# Altium PCB PlatypusDAQ.PcbDoc (part 1 of 2)
Units mil, origin at the board's own origin, x right, y up, seen from the top; angles counter-clockwise.
Board outline 10000 x 4000 mil, 4 copper layers (Top Layer, POWER, GND, Bottom Layer); 258 components, 327 nets, 1659 pads, 184 vias.
Unrouted connection lines stored in the file: 960.
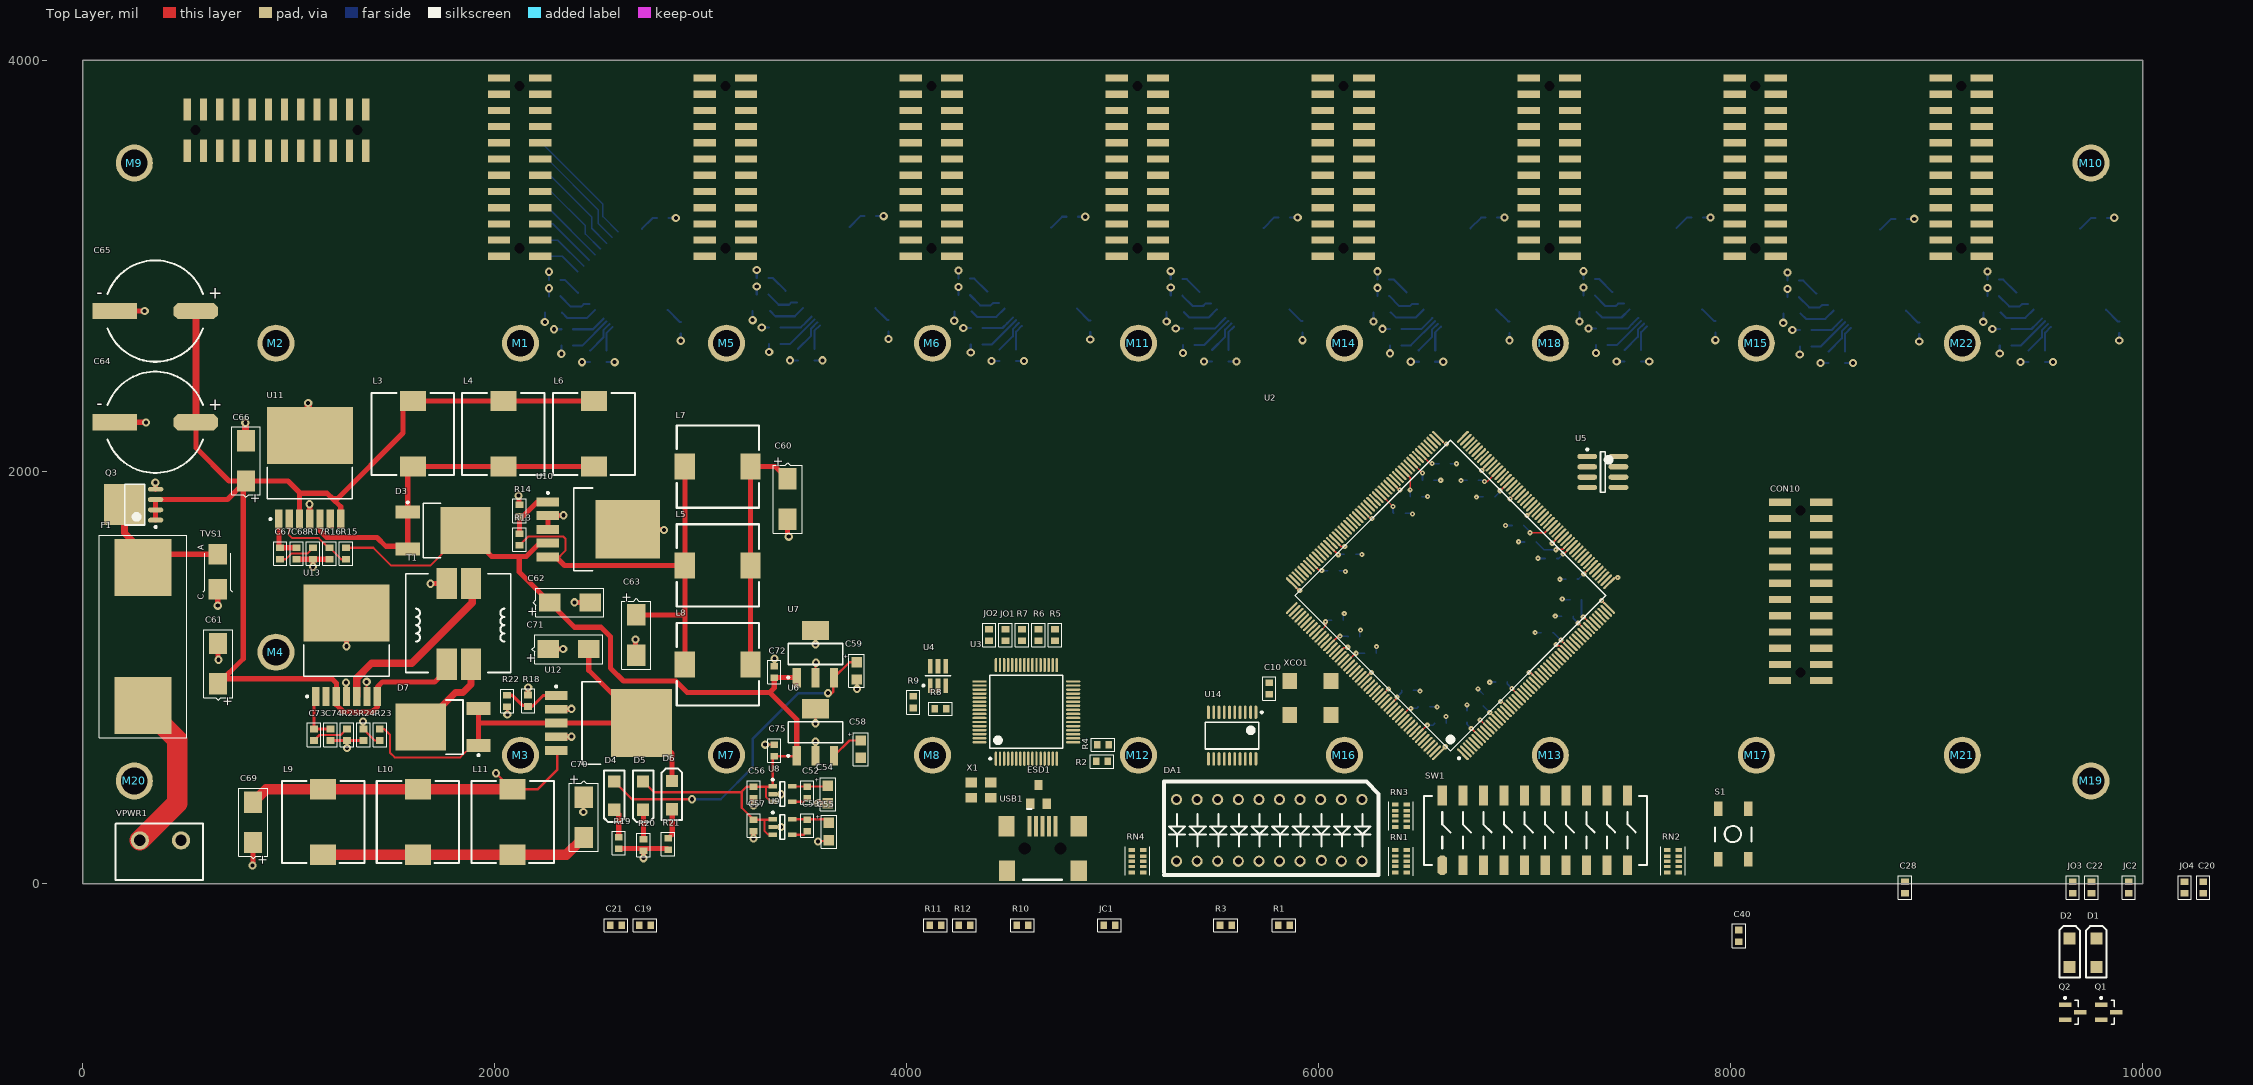
[diagram p0: Top Layer view]
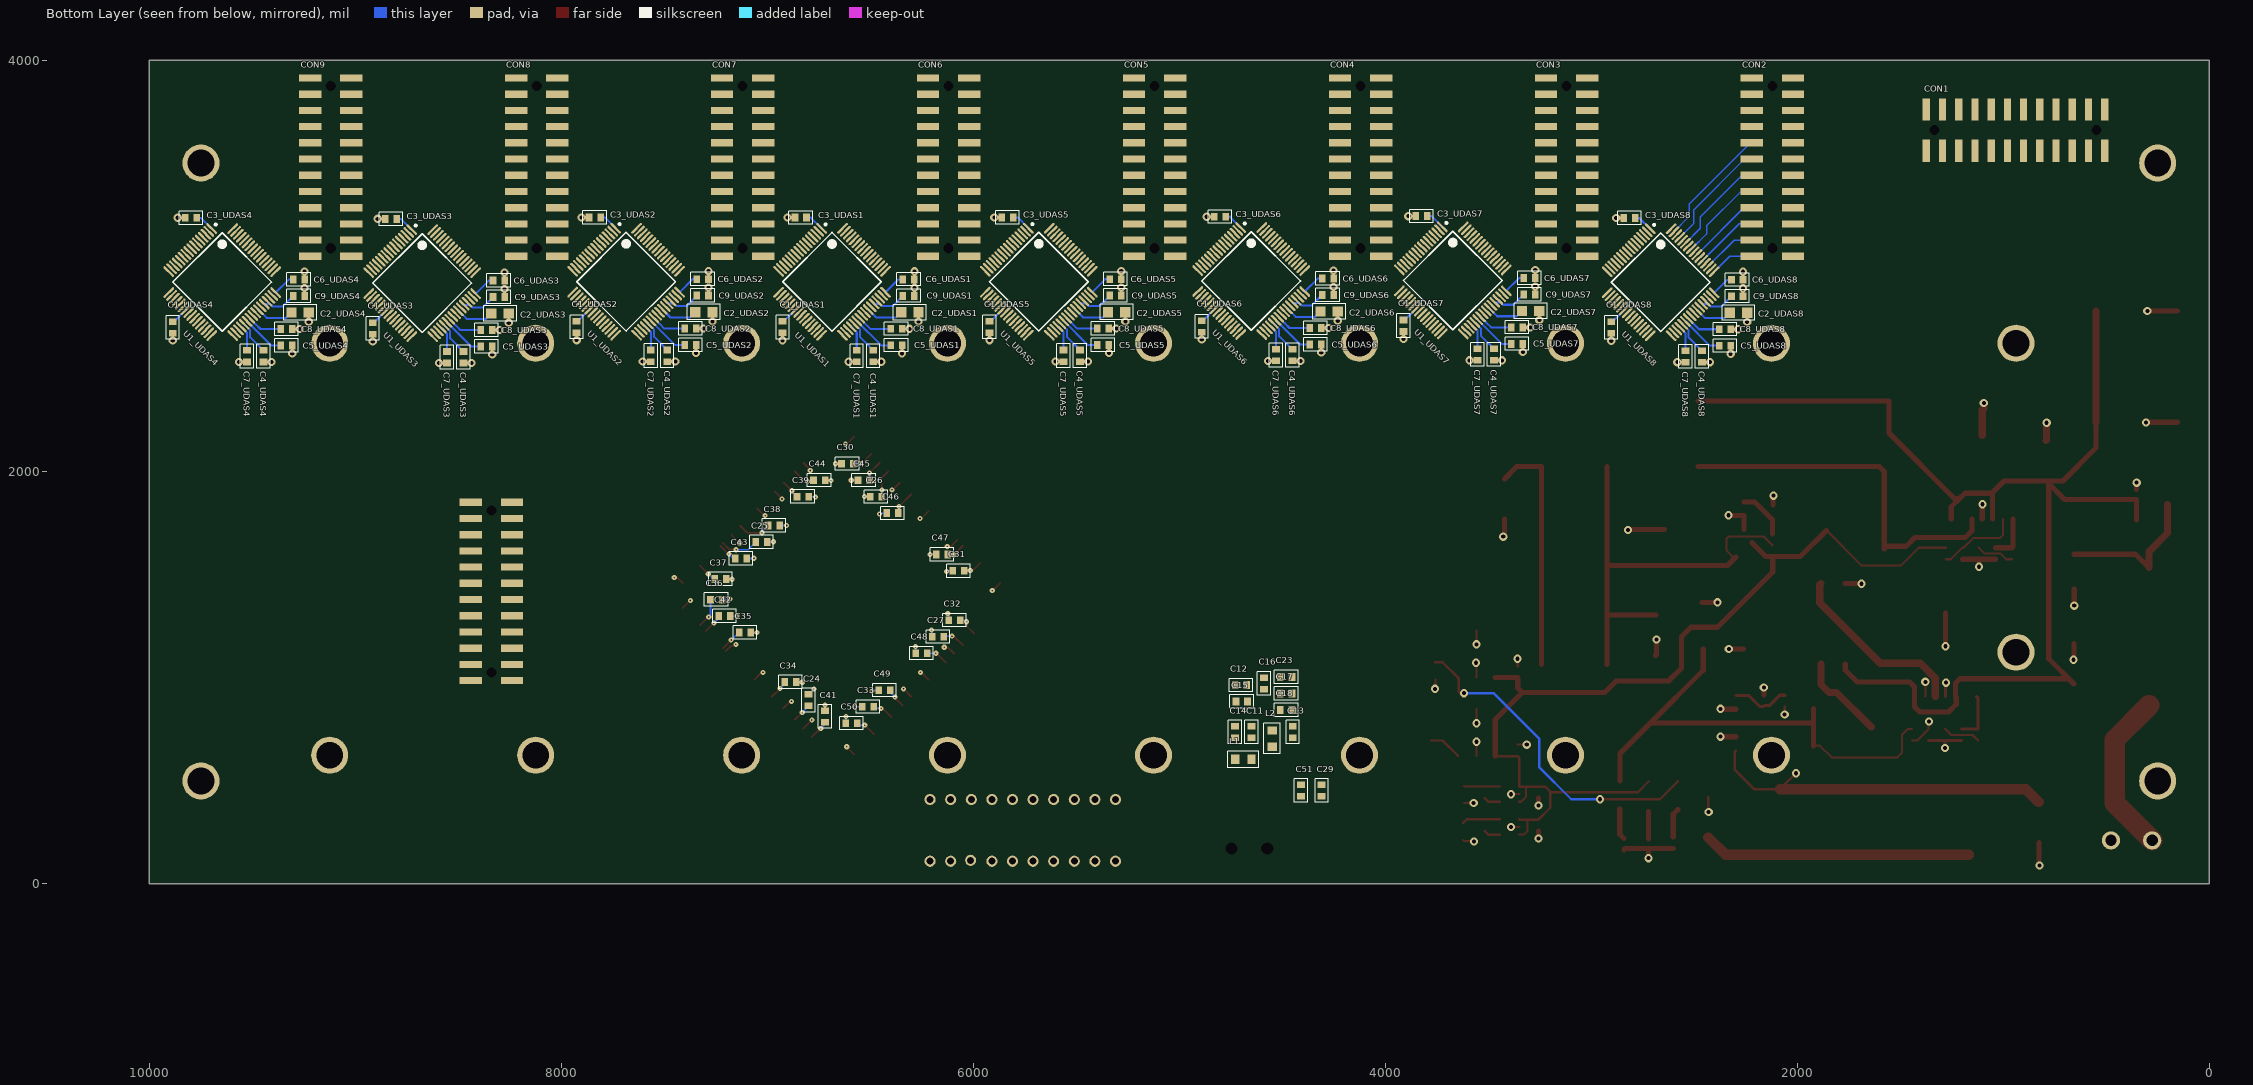
[diagram p1: Bottom Layer view, seen from below]
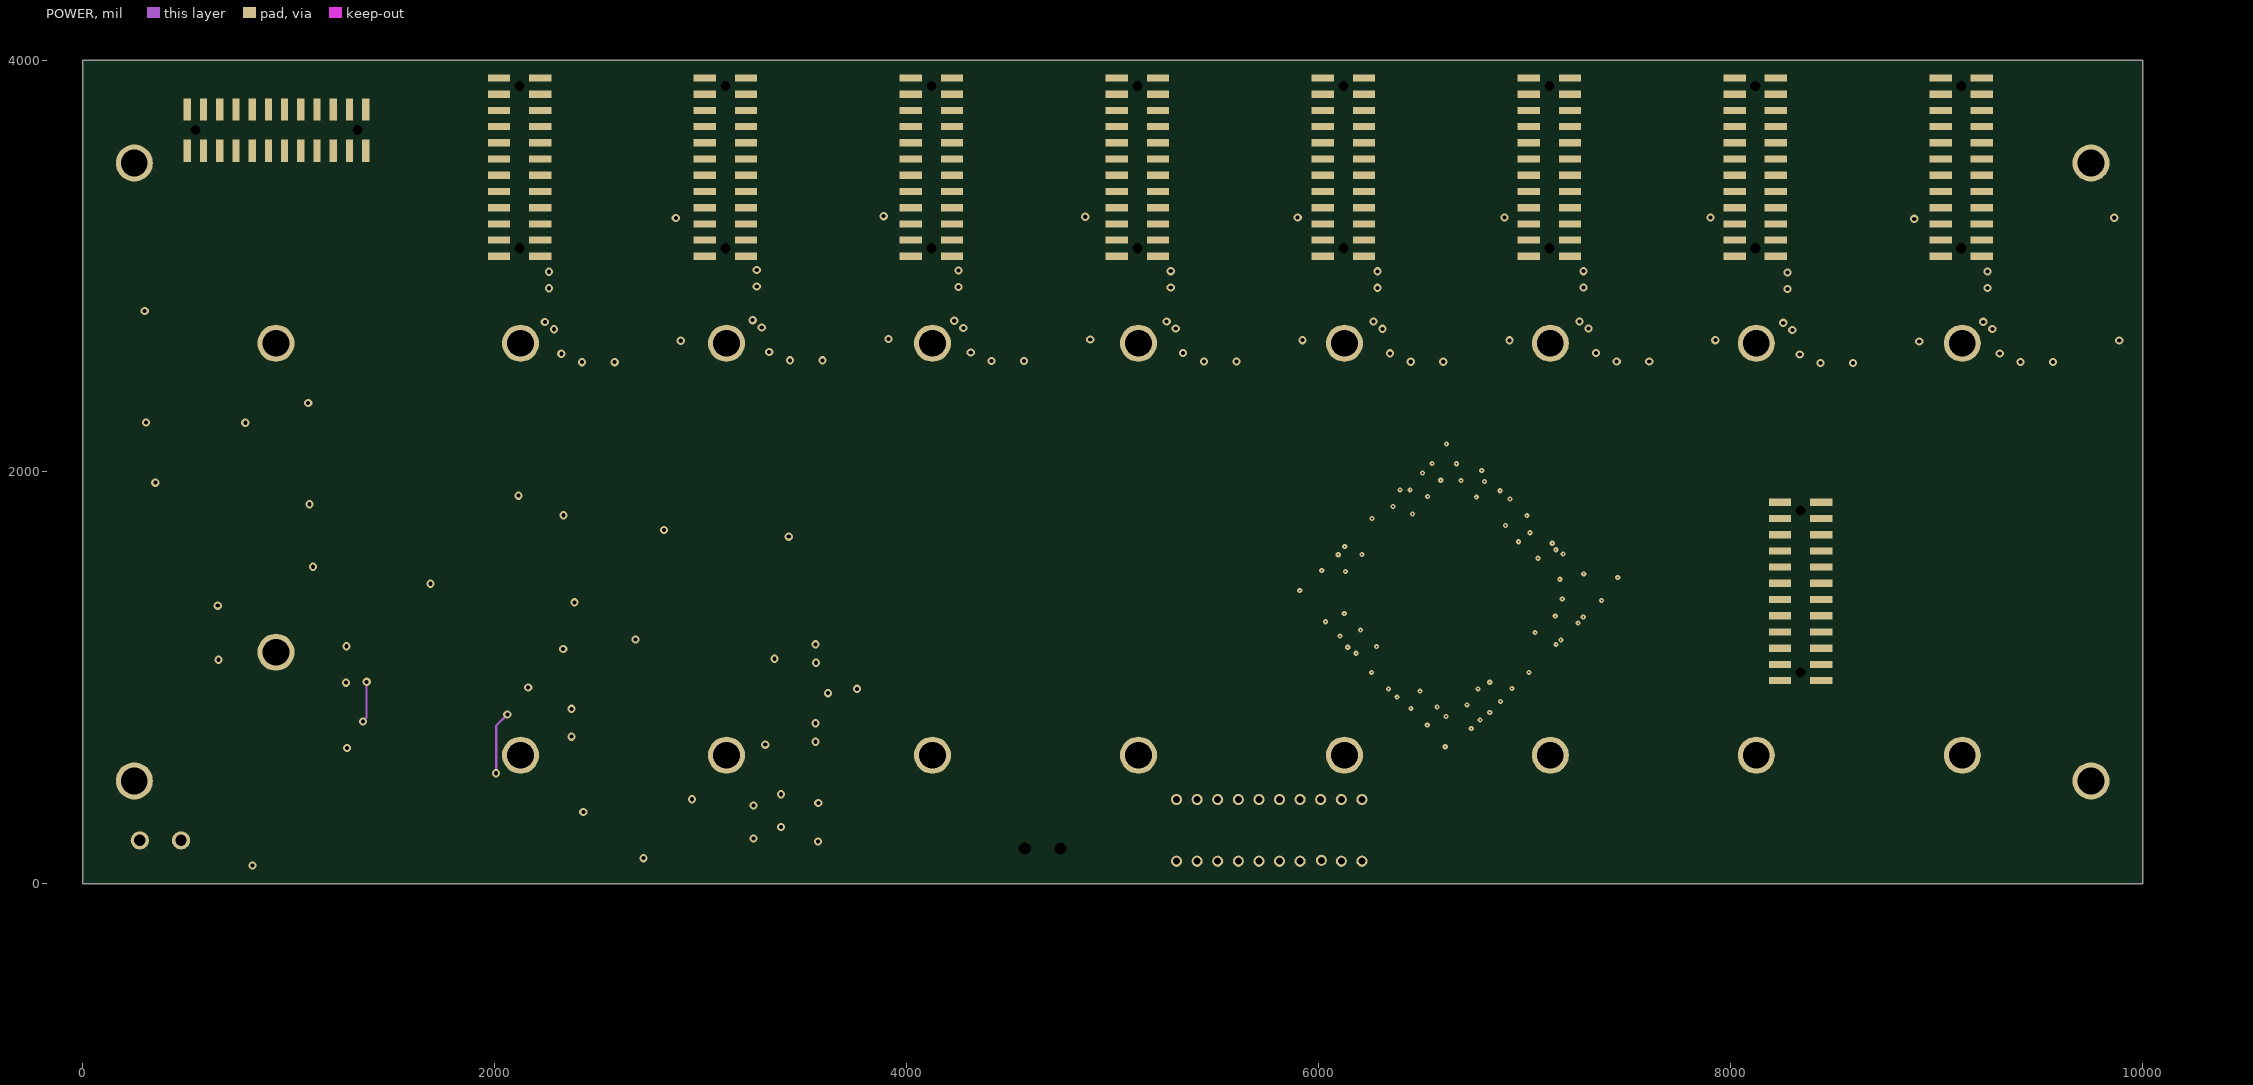
[diagram p2: POWER]
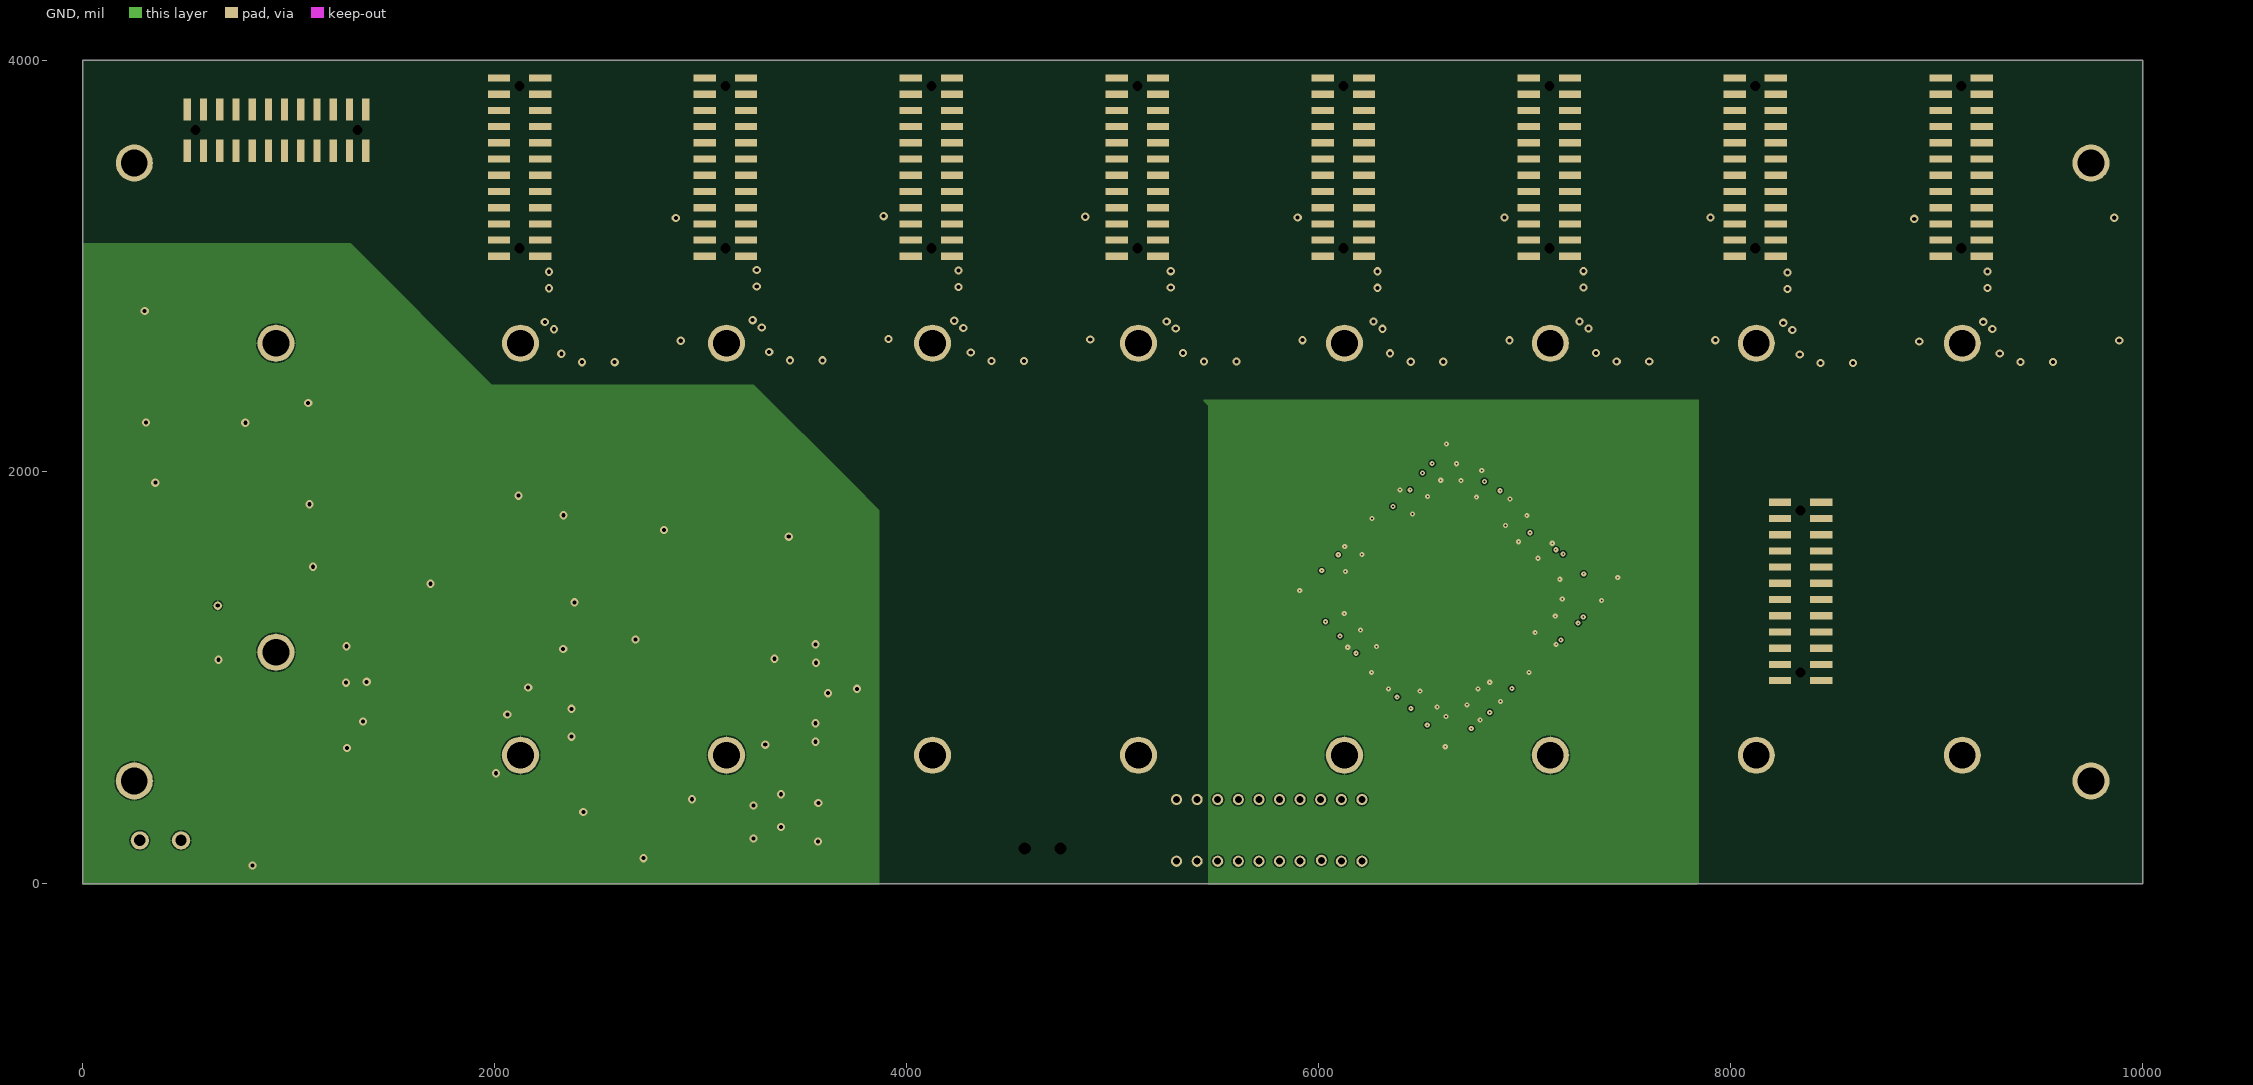
[diagram p3: GND]

## Layer stack, top to bottom
Top Layer: signal copper 1.4
Dielectric: core 12.6, FR-4, Dk 4.8
POWER: signal copper 1.4
Dielectric: prepreg 12.6, FR-4, Dk 4.8
GND: signal copper 1.4
Dielectric: core 12.6, FR-4, Dk 4.8
Bottom Layer: signal copper 1.4

## Board outline
0,0 0,4000 10000,4000 10000,0

## Design rules (kind name [scope] priority, off if disabled: settings)
Clearance "Clearance~Sunstone Circuits" [All] p1: gap=6 // Sunstone Circuits Minimum Clearance Rule (MLB~4&6 Layer Designs)
HoleSize "HoleSize~Sunstone Circuits" [All] p1: absolutevalues=TRUE maxlimit=251 minlimit=8 maxpercent=80.000 minpercent=20.000 // Sunstone Circuits Hole Size Rule (MLB~4&6 Layer Designs)
HoleSize Testpoint [All] p2: absolutevalues=TRUE maxlimit=100 minlimit=1 maxpercent=80.000 minpercent=20.000
HoleSize TestPointUsage [All] p3: absolutevalues=TRUE maxlimit=100 minlimit=1 maxpercent=80.000 minpercent=20.000
MinimumAnnularRing "MinimumAnnularRing~Sunstone Circuits" [All] p1: minimumring=7 // Sunstone Circuits Minimum Annular Ring (MLB~4&6 Layer Designs)
PlaneClearance "PlaneClearance~Sunstone Circuits" [All] p1: clearance=12 // Sunstone Circuits Power Plane Clearance Rule (MLB~4&6 Layer Designs)
PlaneConnect "PlaneConnect~Sunstone Circuits" [All] p1: planeconnectstyle=Relief reliefexpansion=10 reliefentries=4 reliefconductorwidth=8 reliefairgap=10 // Sunstone Circuits Power Plane Connect Rule (MLB~4&6 Layer Designs)
PolygonConnect "PolygonConnect~Sunstone Circuits" [All] p1: connectstyle=Relief reliefconductorwidth=8 reliefentries=4 polygonreliefangle="90 Angle" // Sunstone Circuits Polygon Connect Style (MLB~4&6 Layer Designs)
RoomDefinition UDAS4 [InComponentClass('UDAS4')] p1: confinementstyle=ConfineIn formatcopy=TRUE lockcomponents=FALSE outline 9175.8,2491.17 10037.8,2491.17 10037.8,3312.17 9175.8,3312.17
RoomDefinition UDAS3 [InComponentClass('UDAS3')] p2: confinementstyle=ConfineIn formatcopy=TRUE lockcomponents=FALSE outline 8204.8,2486.17 9066.8,2486.17 9066.8,3307.17 8204.8,3307.17
RoomDefinition UDAS5 [InComponentClass('UDAS5')] p3: confinementstyle=ConfineIn formatcopy=TRUE lockcomponents=FALSE outline 5210.8,2493.17 6072.8,2493.17 6072.8,3314.17 5210.8,3314.17
RoomDefinition UDAS2 [InComponentClass('UDAS2')] p4: confinementstyle=ConfineIn formatcopy=TRUE lockcomponents=FALSE outline 7214.8,2493.17 8076.8,2493.17 8076.8,3314.17 7214.8,3314.17
RoomDefinition UDAS1 [InComponentClass('UDAS1')] p5: confinementstyle=ConfineIn formatcopy=TRUE lockcomponents=FALSE outline 6214.8,2492.17 7076.8,2492.17 7076.8,3313.17 6214.8,3313.17
RoomDefinition UDAS6 [InComponentClass('UDAS6')] p6: confinementstyle=ConfineIn formatcopy=TRUE lockcomponents=FALSE outline 4179.8,2496.17 5041.8,2496.17 5041.8,3317.17 4179.8,3317.17
RoomDefinition UDAS7 [InComponentClass('UDAS7')] p7: confinementstyle=ConfineIn formatcopy=TRUE lockcomponents=FALSE outline 3200.8,2499.17 4062.8,2499.17 4062.8,3320.17 3200.8,3320.17
RoomDefinition UDAS8 [InComponentClass('UDAS8')] p8: confinementstyle=ConfineIn formatcopy=TRUE lockcomponents=FALSE outline 2191.8,2490.17 3053.8,2490.17 3053.8,3311.17 2191.8,3311.17
RoomDefinition U_Power_Supply [InComponentClass('U_Power_Supply')] p9: confinementstyle=ConfineIn formatcopy=TRUE lockcomponents=FALSE outline 33.68,1980.1 33.68,3042.23 669.91,3042.23 669.91,2422.25 2661.8,2422.25 2661.8,2067.17 3329.8,2067.17 3329.8,1273.41 3535.5,1273.41 3535.5,1107.17 3632.3,1107.17 3632.3,727.17 3652.3,727.17 3652.3,536.17 3535.5,536.17 3535.5,528.92 3497.3,528.92 3497.3,136.17 2896.8,136.17 2896.8,122.67 2301.8,122.67 2301.8,78.97 909.8,78.97 909.8,75.17 598.1,75.17 598.1,3.25 142.9,3.25 142.9,696.54 66.7,696.54 66.7,1980.1
RoomDefinition PlatypusDAQ [InComponentClass('PlatypusDAQ')] p10: confinementstyle=ConfineIn formatcopy=TRUE lockcomponents=FALSE outline 147,397 147,3603 476.41,3827.13 1952.87,3943.59 9287.13,3943.59 9853,3603 10340.5,52.5 10340.5,-88.5 9923.63,-704.09 9572.61,-704.09 2517.6,-246
RoutingVias "RoutingVias~Sunstone Circuits" [All] p1: holewidth=16 width=30 viastyle="Through Hole" minholewidth=8 minwidth=24 maxholewidth=20 maxwidth=40 // Sunstone Circuits Routing Vias Rule (MLB~4&6 Layer Designs)
ShortCircuit "ShortCircuit~Sunstone Circuits" [All] p1: allowed=FALSE // Sunstone Circuits Short Circuit Rule~Do Not Allow (MLB~4&6 Layer Designs)
SilkscreenOverComponentPads [All] p1: minsilkscreentomaskgap=10
SolderMaskExpansion "SolderMaskExpansion~Sunstone Circuits" [All] p1: expansion=3 // Sunstone Circuits Solder Mask Expansion Rule (MLB~4&6 Layer Designs)
ViasUnderSMD "ViasUnderSMD~Sunstone Circuits" [All] p1: allowed=FALSE // Sunstone Circuits Vias Under SMD~Do Not Allow (MLB~4&6 Layer Designs)
Width "Width~Sunstone Circuits" [All] p1: maxlimit=100 minlimit=6 preferedwidth=10 // Sunstone Circuits Minimum Width Rule (MLB~4&6 Layer Designs)
23 further rules are at their usual default settings.

## Classes and differential pairs
component class PlatypusDAQ: C10 C11 C12 C13 C14 C15 C16 C17 C18 C19 C20 C21 C22 C23 C24 C25 C26 C27 C28 C29 C30 C31 C32 C33 C34 C35 C36 C37 C38 C39 C40 C41 C42 C43 C44 C45 C46 C47 C48 C49 C50 C51 CON1 CON2 CON3 CON4 CON5 CON6 CON7 CON8 CON9 CON10 D1 D2 DA1 ESD1 JC1 JC2 JO1 JO2 JO3 JO4 L1 L2 M1 M2 M3 M4 M5 M6 M7 M8 M9 M10 M11 M12 M13 M14 M15 M16 M17 M18 M19 M20 M21 M22 Q1 Q2 R1 R2 R3 R4 R5 R6 R7 R8 R9 R10 R11 R12 RN1 RN2 RN3 RN4 S1 SW1 U2 U3 U4 U5 U14 USB1 X1 XCO1
component class UDAS1: C1_UDAS1 C2_UDAS1 C3_UDAS1 C4_UDAS1 C5_UDAS1 C6_UDAS1 C7_UDAS1 C8_UDAS1 C9_UDAS1 U1_UDAS1
component class UDAS2: C1_UDAS2 C2_UDAS2 C3_UDAS2 C4_UDAS2 C5_UDAS2 C6_UDAS2 C7_UDAS2 C8_UDAS2 C9_UDAS2 U1_UDAS2
component class UDAS3: C1_UDAS3 C2_UDAS3 C3_UDAS3 C4_UDAS3 C5_UDAS3 C6_UDAS3 C7_UDAS3 C8_UDAS3 C9_UDAS3 U1_UDAS3
component class UDAS4: C1_UDAS4 C2_UDAS4 C3_UDAS4 C4_UDAS4 C5_UDAS4 C6_UDAS4 C7_UDAS4 C8_UDAS4 C9_UDAS4 U1_UDAS4
component class UDAS5: C1_UDAS5 C2_UDAS5 C3_UDAS5 C4_UDAS5 C5_UDAS5 C6_UDAS5 C7_UDAS5 C8_UDAS5 C9_UDAS5 U1_UDAS5
component class UDAS6: C1_UDAS6 C2_UDAS6 C3_UDAS6 C4_UDAS6 C5_UDAS6 C6_UDAS6 C7_UDAS6 C8_UDAS6 C9_UDAS6 U1_UDAS6
component class UDAS7: C1_UDAS7 C2_UDAS7 C3_UDAS7 C4_UDAS7 C5_UDAS7 C6_UDAS7 C7_UDAS7 C8_UDAS7 C9_UDAS7 U1_UDAS7
component class UDAS8: C1_UDAS8 C2_UDAS8 C3_UDAS8 C4_UDAS8 C5_UDAS8 C6_UDAS8 C7_UDAS8 C8_UDAS8 C9_UDAS8 U1_UDAS8
component class U_Power_Supply: C52 C53 C54 C55 C56 C57 C58 C59 C60 C61 C62 C63 C64 C65 C66 C67 C68 C69 C70 C71 C72 C73 C74 C75 D3 D4 D5 D6 D7 F1 L3 L4 L5 L6 L7 L8 L9 L10 L11 Q3 R13 R14 R15 R16 R17 R18 R19 R20 R21 R22 R23 R24 R25 T1 TVS1 U6 U7 U8 U9 U10 U11 U12 U13 VPWR1
net class DB[15..0]: DB0 DB1 DB2 DB3 DB4 DB5 DB6 DB7 DB8 DB9 DB10 DB11 DB12 DB13 DB14 DB15
net class HS_DB_IO[7..0]: HS_DB_IO0 HS_DB_IO1 HS_DB_IO2 HS_DB_IO3 HS_DB_IO4 HS_DB_IO5 HS_DB_IO6 HS_DB_IO7
channel class DataAquisitionSystem: UDAS1 UDAS2 UDAS3 UDAS4 UDAS5 UDAS6 UDAS7 UDAS8

## Components (designator, comment, footprint, x,y, rotation, side; value= is the part's Value field where it differs from the comment)
C1_UDAS1 "CAP" SM/C_0603 6926,2675 r90 bottom (schematic designator C1)
C1_UDAS2 "CAP" SM/C_0603 7926,2676 r90 bottom (schematic designator C1)
C1_UDAS3 "CAP" SM/C_0603 8916,2669 r90 bottom (schematic designator C1)
C1_UDAS4 "CAP" SM/C_0603 9887,2674 r90 bottom (schematic designator C1)
C1_UDAS5 "CAP" SM/C_0603 5922,2676 r90 bottom (schematic designator C1)
C1_UDAS6 "CAP" SM/C_0603 4891,2679 r90 bottom (schematic designator C1)
C1_UDAS7 "CAP" SM/C_0603 3912,2682 r90 bottom (schematic designator C1)
C1_UDAS8 "CAP" SM/C_0603 2903,2673 r90 bottom (schematic designator C1)
C2_UDAS1 "CAP" SM/C_0805 6266,2775 r0 bottom (schematic designator C2)
C2_UDAS2 "CAP" SM/C_0805 7266,2776 r0 bottom (schematic designator C2)
C2_UDAS3 "CAP" SM/C_0805 8256,2769 r0 bottom (schematic designator C2)
C2_UDAS4 "CAP" SM/C_0805 9227,2774 r0 bottom (schematic designator C2)
C2_UDAS5 "CAP" SM/C_0805 5262,2776 r0 bottom (schematic designator C2)
C2_UDAS6 "CAP" SM/C_0805 4231,2779 r0 bottom (schematic designator C2)
C2_UDAS7 "CAP" SM/C_0805 3252,2782 r0 bottom (schematic designator C2)
C2_UDAS8 "CAP" SM/C_0805 2243,2773 r0 bottom (schematic designator C2)
C3_UDAS1 "CAP" SM/C_0603 6866,3235 r180 bottom (schematic designator C3)
C3_UDAS2 "CAP" SM/C_0603 7866,3236 r180 bottom (schematic designator C3)
C3_UDAS3 "CAP" SM/C_0603 8856,3229 r180 bottom (schematic designator C3)
C3_UDAS4 "CAP" SM/C_0603 9827,3234 r180 bottom (schematic designator C3)
C3_UDAS5 "CAP" SM/C_0603 5862,3236 r180 bottom (schematic designator C3)
C3_UDAS6 "CAP" SM/C_0603 4831,3239 r180 bottom (schematic designator C3)
C3_UDAS7 "CAP" SM/C_0603 3852,3242 r180 bottom (schematic designator C3)
C3_UDAS8 "CAP" SM/C_0603 2843,3233 r180 bottom (schematic designator C3)
C4_UDAS1 "CAP" SM/C_0603 6486,2535 r90 bottom (schematic designator C4)
C4_UDAS2 "CAP" SM/C_0603 7486,2536 r90 bottom (schematic designator C4)
C4_UDAS3 "CAP" SM/C_0603 8476,2529 r90 bottom (schematic designator C4)
C4_UDAS4 "CAP" SM/C_0603 9447,2534 r90 bottom (schematic designator C4)
C4_UDAS5 "CAP" SM/C_0603 5482,2536 r90 bottom (schematic designator C4)
C4_UDAS6 "CAP" SM/C_0603 4451,2539 r90 bottom (schematic designator C4)
C4_UDAS7 "CAP" SM/C_0603 3472,2542 r90 bottom (schematic designator C4)
C4_UDAS8 "CAP" SM/C_0603 2463,2533 r90 bottom (schematic designator C4)
C5_UDAS1 "CAP" SM/C_0603 6346,2615 r0 bottom (schematic designator C5)
C5_UDAS2 "CAP" SM/C_0603 7346,2616 r0 bottom (schematic designator C5)
C5_UDAS3 "CAP" SM/C_0603 8336,2609 r0 bottom (schematic designator C5)
C5_UDAS4 "CAP" SM/C_0603 9307,2614 r0 bottom (schematic designator C5)
C5_UDAS5 "CAP" SM/C_0603 5342,2616 r0 bottom (schematic designator C5)
C5_UDAS6 "CAP" SM/C_0603 4311,2619 r0 bottom (schematic designator C5)
C5_UDAS7 "CAP" SM/C_0603 3332,2622 r0 bottom (schematic designator C5)
C5_UDAS8 "CAP" SM/C_0603 2323,2613 r0 bottom (schematic designator C5)
C6_UDAS1 "CAP" SM/C_0603 6286,2935 r0 bottom (schematic designator C6)
C6_UDAS2 "CAP" SM/C_0603 7286,2936 r0 bottom (schematic designator C6)
C6_UDAS3 "CAP" SM/C_0603 8276,2929 r0 bottom (schematic designator C6)
C6_UDAS4 "CAP" SM/C_0603 9247,2934 r0 bottom (schematic designator C6)
C6_UDAS5 "CAP" SM/C_0603 5282,2936 r0 bottom (schematic designator C6)
C6_UDAS6 "CAP" SM/C_0603 4251,2939 r0 bottom (schematic designator C6)
C6_UDAS7 "CAP" SM/C_0603 3272,2942 r0 bottom (schematic designator C6)
C6_UDAS8 "CAP" SM/C_0603 2263,2933 r0 bottom (schematic designator C6)
C7_UDAS1 "CAP" SM/C_0603 6566,2535 r90 bottom (schematic designator C7)
C7_UDAS2 "CAP" SM/C_0603 7566,2536 r90 bottom (schematic designator C7)
C7_UDAS3 "CAP" SM/C_0603 8556,2529 r90 bottom (schematic designator C7)
C7_UDAS4 "CAP" SM/C_0603 9527,2534 r90 bottom (schematic designator C7)
C7_UDAS5 "CAP" SM/C_0603 5562,2536 r90 bottom (schematic designator C7)
C7_UDAS6 "CAP" SM/C_0603 4531,2539 r90 bottom (schematic designator C7)
C7_UDAS7 "CAP" SM/C_0603 3552,2542 r90 bottom (schematic designator C7)
C7_UDAS8 "CAP" SM/C_0603 2543,2533 r90 bottom (schematic designator C7)
C8_UDAS1 "CAP" SM/C_0603 6346,2695 r0 bottom (schematic designator C8)
C8_UDAS2 "CAP" SM/C_0603 7346,2696 r0 bottom (schematic designator C8)
C8_UDAS3 "CAP" SM/C_0603 8336,2689 r0 bottom (schematic designator C8)
C8_UDAS4 "CAP" SM/C_0603 9307,2694 r0 bottom (schematic designator C8)
C8_UDAS5 "CAP" SM/C_0603 5342,2696 r0 bottom (schematic designator C8)
C8_UDAS6 "CAP" SM/C_0603 4311,2699 r0 bottom (schematic designator C8)
C8_UDAS7 "CAP" SM/C_0603 3332,2702 r0 bottom (schematic designator C8)
C8_UDAS8 "CAP" SM/C_0603 2323,2693 r0 bottom (schematic designator C8)
C9_UDAS1 "CAP" SM/C_0603 6286,2855 r0 bottom (schematic designator C9)
C9_UDAS2 "CAP" SM/C_0603 7286,2856 r0 bottom (schematic designator C9)
C9_UDAS3 "CAP" SM/C_0603 8276,2849 r0 bottom (schematic designator C9)
C9_UDAS4 "CAP" SM/C_0603 9247,2854 r0 bottom (schematic designator C9)
C9_UDAS5 "CAP" SM/C_0603 5282,2856 r0 bottom (schematic designator C9)
C9_UDAS6 "CAP" SM/C_0603 4251,2859 r0 bottom (schematic designator C9)
C9_UDAS7 "CAP" SM/C_0603 3272,2862 r0 bottom (schematic designator C9)
C9_UDAS8 "CAP" SM/C_0603 2263,2853 r0 bottom (schematic designator C9)
C10 "CAP" SM/C_0603 5760,920 r90 top
C11 "CAP" SM/C_0603 4649,765 r270 bottom
C12 "CAP" SM/C_0603 4729,965 r180 bottom
C13 "CAP" SM/C_0603 4449,765 r270 bottom
C14 "CAP" SM/C_0603 4729,765 r270 bottom
C15 "CAP" SM/C_0603 4669,885 r0 bottom
C16 "CAP" SM/C_0603 4589,945 r90 bottom
C17 "CAP" SM/C_0603 4509,925 r180 bottom
C18 "CAP" SM/C_0603 4509,845 r180 bottom
C19 "CAP" SM/C_0603 2701.1,-200.5 r0 top
C20 "CAP" SM/C_0603 10295,-46 r90 top
C21 "CAP" SM/C_0603 2560.1,-200.5 r0 top
C22 "CAP" SM/C_0603 9752,-46 r90 top
C23 "CAP" SM/C_0603 4509,1005 r180 bottom
C24 "CAP" SM/C_0603 6800,920 r270 bottom
C25 "CAP" SM/C_0603 7000,1660 r0 bottom
C26 "CAP" SM/C_0603 6500,1880 r180 bottom
C27 "CAP" SM/C_0603 6200,1200 r180 bottom
C28 "CAP" SM/C_0603 8847,-46 r90 top
C29 "CAP" SM/C_0603 4309,425 r90 bottom
C30 "CAP" SM/C_0603 6640,2040 r180 bottom
C31 "CAP" SM/C_0603 6100,1520 r180 bottom
C32 "CAP" SM/C_0603 6120,1280 r180 bottom
C33 "CAP" SM/C_0603 6540,860 r180 bottom
C34 "CAP" SM/C_0603 6860,980 r0 bottom
C35 "CAP" SM/C_0603 7080,1220 r0 bottom
C36 "CAP" SM/C_0603 7220,1380 r0 bottom
C37 "CAP" SM/C_0603 7200,1480 r0 bottom
C38 "CAP" SM/C_0603 6940,1740 r0 bottom
C39 "CAP" SM/C_0603 6800,1880 r0 bottom
C40 "CAP" SM/C_0603 8040,-280 r90 top
C41 "CAP" SM/C_0603 6720,840 r270 bottom
C42 "CAP" SM/C_0603 7180,1300 r0 bottom
C43 "CAP" SM/C_0603 7100,1580 r0 bottom
C44 "CAP" SM/C_0603 6720,1960 r0 bottom
C45 "CAP" SM/C_0603 6560,1960 r180 bottom
C46 "CAP" SM/C_0603 6420,1800 r180 bottom
C47 "CAP" SM/C_0603 6180,1600 r180 bottom
C48 "CAP" SM/C_0603 6280,1120 r180 bottom
C49 "CAP" SM/C_0603 6460,940 r180 bottom
C50 "CAP" SM/C_0603 6620,780 r180 bottom
C51 "CAP" SM/C_0603 4409,425 r90 bottom
C52 "CAP" SM/C_0603 3516.8,416.17 r90 top
C53 "CAP" SM/C_0603 3516.8,256.17 r90 top
C54 "CAP_POL" SM/C_POL_0805 3616.8,476.17 r270 top
C55 "CAP_POL" SM/C_POL_0805 3621.8,296.17 r270 top
C56 "CAP" SM/C_0603 3256.8,416.17 r90 top
C57 "CAP" SM/C_0603 3256.8,256.17 r90 top
C58 "CAP_POL" SM/C_POL_0805 3776.8,696.17 r270 top
C59 "CAP_POL" SM/C_POL_0805 3756.8,1076.17 r270 top
C60 "CAP_POL" SM/CT_6032_12 3421.8,1966.17 r270 top
C61 "CAP_POL" SM/CT_6032_12 656.8,971.17 r90 top
C62 "CAP_POL" SM/CT_6032_12 2266.8,1366.17 r0 top
C63 "CAP_POL" SM/CT_6032_12 2686.8,1306.17 r270 top
C64 "CAP_POL" CAP-CAN-SMD-POL-12.5mmDia 351.8,2241.17 r180 top
C65 "CAP_POL" CAP-CAN-SMD-POL-12.5mmDia 351.8,2781.17 r180 top
C66 "CAP_POL" SM/CT_6032_12 791.8,1956.17 r90 top
C67 "CAP" SM/C_0603 957.8,1576.17 r90 top
C68 "CAP" SM/C_0603 1037.8,1576.17 r90 top
C69 "CAP_POL" SM/CT_6032_12 826.8,201.17 r90 top
C70 "CAP_POL" SM/CT_6032_12 2431.8,421.17 r270 top
C71 "CAP_POL" SM/CT_6032_12 2260,1140 r0 top
C72 "CAP" SM/C_0603 3356.8,1056.17 r270 top
C73 "CAP" SM/C_0603 1121.8,696.17 r90 top
C74 "CAP" SM/C_0603 1201.8,696.17 r90 top
C75 "CAP" SM/C_0603 3356.8,676.17 r270 top
CON1 "24pinHeader" CONN-RECEPT-24PIN 940,3660 r180 bottom
CON2 "24pinHeader" CONN-RECEPT-24PIN 2120,3480 r90 bottom
CON3 "24pinHeader" CONN-RECEPT-24PIN 3120,3480 r90 bottom
CON4 "24pinHeader" CONN-RECEPT-24PIN 4120,3480 r90 bottom
CON5 "24pinHeader" CONN-RECEPT-24PIN 5120,3480 r90 bottom
CON6 "24pinHeader" CONN-RECEPT-24PIN 6120,3480 r90 bottom
CON7 "24pinHeader" CONN-RECEPT-24PIN 7120,3480 r90 bottom
CON8 "24pinHeader" CONN-RECEPT-24PIN 8120,3480 r90 bottom
CON9 "24pinHeader" CONN-RECEPT-24PIN 9120,3480 r90 bottom
CON10 "24pinHeader" CONN-RECEPT-24PIN 8340,1420 r90 top
D1 "LED" LED-1206 9776.03,-265.22 r0 top
D2 "LED" LED-1206 9646.03,-265.22 r0 top
D3 "MBRS360BT3G" DPAK-MBRD835L 1736.8,1716.17 r0 top
D4 "LED" LED-1206 2580,360 r180 top
D5 "LED" LED-1206 2720,360 r180 top
D6 "LED" LED-1206 2860,500 r0 top
D7 "MBRS360BT3G" DPAK-MBRD835L 1761.8,761.17 r180 top
DA1 "LEDS" LEDBARGRAPH 5760,260 r270 top
ESD1 "PGB1" SOT23-PGB1-ESD 4640,480 r0 top
F1 "0031.8221" "SCHURTER/SMD/2 PADS/0031.8221" 291.8,1201.17 r90 top
JC1 "Res" SM/R_0603 4957.1,-200.5 r0 top
JC2 "Res" SM/R_0603 9933,-46 r90 top
JO1 "Res" SM/R_0603 4480,1180 r90 top
JO2 "Res" SM/R_0603 4400,1180 r90 top
JO3 "Res" SM/R_0603 9661.5,-46 r90 top
JO4 "Res" SM/R_0603 10204.5,-46 r90 top
L1 "Inductor" SM/L_0805 4729,605 r180 bottom
L2 "Inductor" SM/L_0805 4549,745 r270 bottom
L3 "22uH" G_JMETRIC/TDK/SLE10145 1601.8,2026.17 r90 top
L4 "22uH" G_JMETRIC/TDK/SLE10145 2041.8,2026.17 r90 top
L5 "22uH" G_JMETRIC/TDK/SLE10145 3241.8,1546.17 r180 top
L6 "22uH" G_JMETRIC/TDK/SLE10145 2481.8,2026.17 r90 top
L7 "22uH" G_JMETRIC/TDK/SLE10145 3241.8,2026.17 r180 top
L8 "22uH" G_JMETRIC/TDK/SLE10145 3241.8,1066.17 r180 top
L9 "22uH" G_JMETRIC/TDK/SLE10145 1166.8,141.17 r90 top
L10 "22uH" G_JMETRIC/TDK/SLE10145 1626.8,141.17 r90 top
L11 "22uH" G_JMETRIC/TDK/SLE10145 2086.8,141.17 r90 top
M1 "HOLE" MOUNTING_HOLE-125MIL 2125,2625 r0 top locked
M2 "HOLE" MOUNTING_HOLE-125MIL 937.5,2625 r0 top locked
M3 "HOLE" MOUNTING_HOLE-125MIL 2125,625 r0 top locked
M4 "HOLE" MOUNTING_HOLE-125MIL 937.5,1125 r0 top locked
M5 "HOLE" MOUNTING_HOLE-125MIL 3125,2625 r0 top locked
M6 "HOLE" MOUNTING_HOLE-125MIL 4125,2625 r0 top locked
M7 "HOLE" MOUNTING_HOLE-125MIL 3125,625 r0 top locked
M8 "HOLE" MOUNTING_HOLE-125MIL 4125,625 r0 top locked
M9 "HOLE" MOUNTING_HOLE-125MIL 250,3500 r0 top locked
M10 "HOLE" MOUNTING_HOLE-125MIL 9750,3500 r0 top locked
M11 "HOLE" MOUNTING_HOLE-125MIL 5125,2625 r0 top locked
M12 "HOLE" MOUNTING_HOLE-125MIL 5125,625 r0 top locked
M13 "HOLE" MOUNTING_HOLE-125MIL 7125,625 r0 top locked
M14 "HOLE" MOUNTING_HOLE-125MIL 6125,2625 r0 top locked
M15 "HOLE" MOUNTING_HOLE-125MIL 8125,2625 r0 top locked
M16 "HOLE" MOUNTING_HOLE-125MIL 6125,625 r0 top locked
M17 "HOLE" MOUNTING_HOLE-125MIL 8125,625 r0 top locked
M18 "HOLE" MOUNTING_HOLE-125MIL 7125,2625 r0 top locked
M19 "HOLE" MOUNTING_HOLE-125MIL 9750,500 r0 top locked
M20 "HOLE" MOUNTING_HOLE-125MIL 250,500 r0 top locked
M21 "HOLE" MOUNTING_HOLE-125MIL 9125,625 r0 top locked
M22 "HOLE" MOUNTING_HOLE-125MIL 9125,2625 r0 top locked
Q1 "BSS84" SOT23-BSS84-P-MOSFET 9835.88,-623.22 r0 top
Q2 "BSS84" SOT23-BSS84-P-MOSFET 9660.37,-623.22 r0 top
Q3 "SI4423DY-T1-E3" SOIC-8-Lead-Vishay-PFET 251.8,1841.17 r180 top
R1 "Res" SM/R_0603 5803.1,-200.5 r0 top
R2 "Res" SM/R_0603 4920.8,595.17 r0 top
R3 "Res" SM/R_0603 5521.1,-200.5 r0 top
R4 "Res" SM/R_0603 4980.8,675.17 r180 top
R5 "Res" SM/R_0603 4720,1180 r90 top
R6 "Res" SM/R_0603 4640,1180 r90 top
R7 "Res" SM/R_0603 4560,1180 r90 top
R8 "Res" SM/R_0603 4191.8,850.17 r180 top
R9 "Res" SM/R_0603 4031.8,910.17 r270 top
R10 "Res" SM/R_0603 4534.1,-200.5 r0 top
R11 "Res" SM/R_0603 4111.1,-200.5 r0 top
R12 "Res" SM/R_0603 4252.1,-200.5 r0 top
R13 "Res" SM/R_0603 2120,1700 r270 top
R14 "Res" SM/R_0603 2120,1840 r270 top
R15 "Res" SM/R_0603 1277.8,1576.17 r90 top
R16 "Res" SM/R_0603 1197.8,1576.17 r90 top
R17 "Res" SM/R_0603 1117.8,1576.17 r90 top
R18 "Res" SM/R_0603 2161.8,861.17 r90 top
R19 "Res" SM/R_0603 2601.8,171.17 r90 top
R20 "Res" SM/R_0603 2721.8,161.17 r90 top
R21 "Res" SM/R_0603 2841.8,221.17 r270 top
R22 "Res" SM/R_0603 2060,860 r90 top
R23 "Res" SM/R_0603 1441.8,696.17 r90 top
R24 "Res" SM/R_0603 1361.8,696.17 r90 top
R25 "Res" SM/R_0603 1281.8,696.17 r90 top
RN1 "RN-8X" RN-5x603 6400,60 r90 top
RN2 "RN-8X" RN-5x603 7720,160 r270 top
RN3 "RN-8X" RN-5x603 6400,280 r90 top
RN4 "RN-8X" RN-5x603 5120,160 r270 top
S1 "MOM-SW-NO" MOM-SW 7940,120 r90 top
SW1 "10 pos spst switch 219-10MST" SW-10pos-SPST 6600,260 r0 top
T1 "DRQ127-100" DRQ127-100 1766.8,1066.17 r90 top
TVS1 "SMAJ20CA-TP" D0-214AC 651.8,1521.17 r90 top
U1_UDAS1 "AD7606" LQFP-64Pins-Analog 6686,2923 r225 bottom (schematic designator U1)
U1_UDAS2 "AD7606" LQFP-64Pins-Analog 7686,2924 r225 bottom (schematic designator U1)
U1_UDAS3 "AD7606" LQFP-64Pins-Analog 8676,2917 r225 bottom (schematic designator U1)
U1_UDAS4 "AD7606" LQFP-64Pins-Analog 9647,2922 r225 bottom (schematic designator U1)
U1_UDAS5 "AD7606" LQFP-64Pins-Analog 5682,2924 r225 bottom (schematic designator U1)
U1_UDAS6 "AD7606" LQFP-64Pins-Analog 4651,2927 r225 bottom (schematic designator U1)
U1_UDAS7 "AD7606" LQFP-64Pins-Analog 3672,2930 r225 bottom (schematic designator U1)
U1_UDAS8 "AD7606" LQFP-64Pins-Analog 2663,2921 r225 bottom (schematic designator U1)
U2 "XC3S500E-PQFP208" PQFP-208PIN-PQ208-PQG208 6640,1400 r135 top
U3 "FT2232H" LQFP-64PIN-FTDI-FT2232H 4580.8,835.17 r90 top
U4 "93C46A" SOT23-93C46-EEPROM-Microchip 4151.8,1010.17 r90 top
U5 "M25P40" SOIC-8pin-micron-M25P40-Flash 7380,2000 r0 top
U6 "LT1129-3.3" SOT223-3Lead-STPackage-LinearTechLT1129-3.3 3556.8,736.17 r90 top
U7 "LT1129-5" SOT223-3Lead-STPackage-LinearTechLT1129-3.3 3556.8,1116.17 r90 top
U8 "LT1767-2.5" TSOT-23-5Lead-LTC3406A 3396.8,436.17 r0 top
U9 "LT1767-1.2" TSOT-23-5Lead-LTC3406A 3396.8,276.17 r0 top
U10 "LM2941" "T0-263- 5Lead - National Semi - LM2941" 2501.8,1721.17 r0 top
U11 "LTC1370" DDPak-7Lead-RPackage-linear 1101.8,2021.17 r90 top
U12 "LM2991" "T0-263 5Lead SMP - National Semi - LM2991S" 2541.8,781.17 r0 top
U13 "LTC1370" DDPak-7Lead-RPackage-linear 1280,1160 r90 top
U14 "74HC541" TSSOP-20PIN-74HC541 5580,720 r270 top
USB1 "USB MiniB" USB-MINIB 4660,280 r0 top
VPWR1 "TERM BLOCK 2POS" Conn-ScrewTerminal-2pin-Phoenix 476.8,211.17 r180 top
X1 "XTAL-FA238V" "XTAL 12MHz SMD" 4360.8,455.17 r180 top
XCO1 "OSC" CB3&CB3LV-XCO 5860,820 r0 top

## Footprints (in the part's own frame and the unit in brackets; to place one, negate y for a bottom-side part, rotate by r counter-clockwise, add the part's x,y. Pads: shape width x height; smd on the part's side, far side on the other; paste and mask are expansions set on the pad)
CAP-CAN-SMD-POL-12.5mmDia [mm] "Surface Mount - EEE-1EA100SR"
  oct 5.5x2 smd: 1(-5,0)
  rect 5.5x2 smd: 2(5,0)
  silkscreen extent -5.87,-6.25 5.87,6.25
CB3&CB3LV-XCO [mm] "CTS"
  rect 1.8x2 smd: 1(0,0) 2(5.08,0) 3(5.08,4.2) 4(0,4.2)
CONN-RECEPT-24PIN [mm] "2MM-SMD-DUAL-24POS-PART#:S6010-12-ND"
  rect 0x0 hole 1.25: 0(-10,0) 0(10,0)
  rect 0.89x2.75 all layers, no hole: 1(-11,-2.54) 2(-11,2.54) 2(-11,2.54) 3(-9,-2.54) 4(-9,2.54) 5(-7,-2.54) 6(-7,2.54) 7(-5,-2.54) 8(-5,2.54) 9(-3,-2.54) 10(-3,2.54) 11(-1,-2.54) 12(-1,2.54) 13(1,-2.54) 14(1,2.54) 15(3,-2.54) 16(3,2.54) 17(5,-2.54) 18(5,2.54) 19(7,-2.54) 20(7,2.54) 21(9,-2.54) 22(9,2.54) 23(11,-2.54) 24(11,2.54)
Conn-ScrewTerminal-2pin-Phoenix [mm] "5.08mm"
  round 2.25 hole 1.4: 1(0,0) 2(5.08,0)
  silkscreen extent -2.7,-2.1 8.1,4.9
D0-214AC [mil]
  rect 100x90 smd: A(79.69,-3.19) C(-90.31,-3.19)
  silkscreen extent -103,-73 85,67
DDPak-7Lead-RPackage-linear [mm] "Linear Tech - LT1370"
  rect 2.35x0.9 smd: 1(-6.35,3.81) 2(-6.35,2.54) 3(-6.35,1.27) 4(-6.35,0) 5(-6.35,-1.27) 6(-6.35,-2.54) 7(-6.35,-3.81)
  rect 7x10.6 smd: 8(3.95,0)
  silkscreen extent -6.47,-5.25 0.05,5.25, body extent -3.85,-5.28 5.55,5.28, height 4
DPAK-MBRD835L [mm] "Diode"
  rect 3x1.6 smd: A(-4.05,-2.29) A(-4.05,2.29)
  rect 6.2x5.8 smd: K(3.073,0)
  silkscreen extent -4.17,-3.35 0,3.59, body extent -2.5,-3.37 3.7,3.37, height 2.38
DRQ127-100 [mm] "Dual Transformer"
  rect 3.85x2.5 smd: 1(0,0) 2(0,-3) 3(9.955,-3) 4(9.95,0)
  silkscreen extent -1.02,-7.87 11.18,5.08, body extent -1.02,-7.87 11.18,5.08, height 8
G_JMETRIC/TDK/SLE10145 [mil]
  rect 98.4x126 smd: 1(0,0) 2(318.88,0)
  silkscreen extent -40,-200 358,200
LED-1206 [mm]
  rect 1.5x1.5 smd: 1(0,-3.5) 2(0,0)
  silkscreen extent -1.27,-4.83 1.27,1.52
LEDBARGRAPH [mil]
  round 54 hole 34: 1(-149.4,450) 2(-149.4,350) 3(-149.4,250) 4(-150,150) 5(-149.4,50) 6(-149.4,-50) 7(-149.4,-150) 8(-149.4,-250) 9(-150,-350) 10(-149.4,-450) 11(150,-450) 12(150,-350) 13(150,-250) 14(150,-150) 15(150,-50) 16(150,50) 17(150,150) 18(145.28,253.15) 19(150,350) 20(150,450)
  silkscreen extent -236,-512 217,531
LQFP-64PIN-FTDI-FT2232H [mm] "FT2232H"
  oval 1.75x0.3 smd: 1(-5.775,3.75) 2(-5.775,3.25) 3(-5.775,2.75) 4(-5.775,2.25) 5(-5.775,1.75) 6(-5.775,1.25) 7(-5.775,0.75) 8(-5.775,0.25) 9(-5.775,-0.25) 10(-5.775,-0.75) 11(-5.775,-1.25) 12(-5.775,-1.75) 13(-5.775,-2.25) 14(-5.775,-2.75) 15(-5.775,-3.25) 16(-5.775,-3.75) 33(5.775,-3.75) 34(5.775,-3.25) 35(5.775,-2.75) 36(5.775,-2.25) 37(5.775,-1.75) 38(5.775,-1.25) 39(5.775,-0.75) 40(5.775,-0.25) 41(5.775,0.25) 42(5.775,0.75) 43(5.775,1.25) 44(5.775,1.75) 45(5.775,2.25) 46(5.775,2.75) 47(5.775,3.25) 48(5.775,3.75)
  oval 0.3x1.75 smd: 17(-3.75,-5.775) 18(-3.25,-5.775) 19(-2.75,-5.775) 20(-2.25,-5.775) 21(-1.75,-5.775) 22(-1.25,-5.775) 23(-0.75,-5.775) 24(-0.25,-5.775) 25(0.25,-5.775) 26(0.75,-5.775) 27(1.25,-5.775) 28(1.75,-5.775) 29(2.25,-5.775) 30(2.75,-5.775) 31(3.25,-5.775) 32(3.75,-5.775) 49(3.75,5.775) 50(3.25,5.775) 51(2.75,5.775) 52(2.25,5.775) 53(1.75,5.775) 54(1.25,5.775) 55(0.75,5.775) 56(0.25,5.775) 57(-0.25,5.775) 58(-0.75,5.775) 59(-1.25,5.775) 60(-1.75,5.775) 61(-2.25,5.775) 62(-2.75,5.775) 63(-3.25,5.775) 64(-3.75,5.775)
  silkscreen extent -5.9,-4.5 4.5,4.57, body extent -5,-5 5,5, height 1
LQFP-64Pins-Analog [mm] "LQFP-64Pins-AnalogDevices-AD7606"
  oval 1.75x0.3 smd: 1(-5.575,3.75) 2(-5.575,3.25) 3(-5.575,2.75) 4(-5.575,2.25) 5(-5.575,1.75) 6(-5.575,1.25) 7(-5.575,0.75) 8(-5.575,0.25) 9(-5.575,-0.25) 10(-5.575,-0.75) 11(-5.575,-1.25) 12(-5.575,-1.75) 13(-5.575,-2.25) 14(-5.575,-2.75) 15(-5.575,-3.25) 16(-5.575,-3.75) 33(5.575,-3.75) 34(5.575,-3.25) 35(5.575,-2.75) 36(5.575,-2.25) 37(5.575,-1.75) 38(5.575,-1.25) 39(5.575,-0.75) 40(5.575,-0.25) 41(5.575,0.25) 42(5.575,0.75) 43(5.575,1.25) 44(5.575,1.75) 45(5.575,2.25) 46(5.575,2.75) 47(5.575,3.25) 48(5.575,3.75)
  oval 0.3x1.75 smd: 17(-3.75,-5.575) 18(-3.25,-5.575) 19(-2.75,-5.575) 20(-2.25,-5.575) 21(-1.75,-5.575) 22(-1.25,-5.575) 23(-0.75,-5.575) 24(-0.25,-5.575) 25(0.25,-5.575) 26(0.75,-5.575) 27(1.25,-5.575) 28(1.75,-5.575) 29(2.25,-5.575) 30(2.75,-5.575) 31(3.25,-5.575) 32(3.75,-5.575) 49(3.75,5.575) 50(3.25,5.575) 51(2.75,5.575) 52(2.25,5.575) 53(1.75,5.575) 54(1.25,5.575) 55(0.75,5.575) 56(0.25,5.575) 57(-0.25,5.575) 58(-0.75,5.575) 59(-1.25,5.575) 60(-1.75,5.575) 61(-2.25,5.575) 62(-2.75,5.575) 63(-3.25,5.575) 64(-3.75,5.575)
  silkscreen extent -5.7,-4.3 4.3,4.57, body extent -5,-5 5,5, height 1.6
MOM-SW [mm] "SMD"
  rect 1.8x1.1 smd: 1(0,0) 2(6.2,0) 3(0,-3.7) 4(6.2,-3.7)
  silkscreen extent 2.1,-4.1 4.1,0.4
MOUNTING_HOLE-125MIL [mil]
  round 180 hole 130: 0(0,0)
PQFP-208PIN-PQ208-PQG208 [mm] "PQFP208 - Xilinx (No Heat Sink)"
  oval 1.95x0.3 smd: 1(-14.925,12.75) 2(-14.925,12.25) 3(-14.925,11.75) 4(-14.925,11.25) 5(-14.925,10.75) 6(-14.925,10.25) 7(-14.925,9.75) 8(-14.925,9.25) 9(-14.925,8.75) 10(-14.925,8.25) 11(-14.925,7.75) 12(-14.925,7.25) 13(-14.925,6.75) 14(-14.925,6.25) 15(-14.925,5.75) 16(-14.925,5.25) 17(-14.925,4.75) 18(-14.925,4.25) 19(-14.925,3.75) 20(-14.925,3.25) 21(-14.925,2.75) 22(-14.925,2.25) 23(-14.925,1.75) 24(-14.925,1.25) 25(-14.925,0.75) 26(-14.925,0.25) 27(-14.925,-0.25) 28(-14.925,-0.75) 29(-14.925,-1.25) 30(-14.925,-1.75) 31(-14.925,-2.25) 32(-14.925,-2.75) 33(-14.925,-3.25) 34(-14.925,-3.75) 35(-14.925,-4.25) 36(-14.925,-4.75) 37(-14.925,-5.25) 38(-14.925,-5.75) 39(-14.925,-6.25) 40(-14.925,-6.75) 41(-14.925,-7.25) 42(-14.925,-7.75) 43(-14.925,-8.25) 44(-14.925,-8.75) 45(-14.925,-9.25) 46(-14.925,-9.75) 47(-14.925,-10.25) 48(-14.925,-10.75) 49(-14.925,-11.25) 50(-14.925,-11.75) 51(-14.925,-12.25) 52(-14.925,-12.75) 105(14.925,-12.75) 106(14.925,-12.25) 107(14.925,-11.75) 108(14.925,-11.25) 109(14.925,-10.75) 110(14.925,-10.25) 111(14.925,-9.75) 112(14.925,-9.25) 113(14.925,-8.75) 114(14.925,-8.25) 115(14.925,-7.75) 116(14.925,-7.25) 117(14.925,-6.75) 118(14.925,-6.25) 119(14.925,-5.75) 120(14.925,-5.25) 121(14.925,-4.75) 122(14.925,-4.25) 123(14.925,-3.75) 124(14.925,-3.25) 125(14.925,-2.75) 126(14.925,-2.25) 127(14.925,-1.75) 128(14.925,-1.25) 129(14.925,-0.75) 130(14.925,-0.25) 131(14.925,0.25) 132(14.925,0.75) 133(14.925,1.25) 134(14.925,1.75) 135(14.925,2.25) 136(14.925,2.75) 137(14.925,3.25) 138(14.925,3.75) 139(14.925,4.25) 140(14.925,4.75) 141(14.925,5.25) 142(14.925,5.75) 143(14.925,6.25) 144(14.925,6.75) 145(14.925,7.25) 146(14.925,7.75) 147(14.925,8.25) 148(14.925,8.75) 149(14.925,9.25) 150(14.925,9.75) 151(14.925,10.25) 152(14.925,10.75) 153(14.925,11.25) 154(14.925,11.75) 155(14.925,12.25) 156(14.925,12.75)
  oval 0.3x1.95 smd: 53(-12.75,-14.925) 54(-12.25,-14.925) 55(-11.75,-14.925) 56(-11.25,-14.925) 57(-10.75,-14.925) 58(-10.25,-14.925) 59(-9.75,-14.925) 60(-9.25,-14.925) 61(-8.75,-14.925) 62(-8.25,-14.925) 63(-7.75,-14.925) 64(-7.25,-14.925) 65(-6.75,-14.925) 66(-6.25,-14.925) 67(-5.75,-14.925) 68(-5.25,-14.925) 69(-4.75,-14.925) 70(-4.25,-14.925) 71(-3.75,-14.925) 72(-3.25,-14.925) 73(-2.75,-14.925) 74(-2.25,-14.925) 75(-1.75,-14.925) 76(-1.25,-14.925) 77(-0.75,-14.925) 78(-0.25,-14.925) 79(0.25,-14.925) 80(0.75,-14.925) 81(1.25,-14.925) 82(1.75,-14.925) 83(2.25,-14.925) 84(2.75,-14.925) 85(3.25,-14.925) 86(3.75,-14.925) 87(4.25,-14.925) 88(4.75,-14.925) 89(5.25,-14.925) 90(5.75,-14.925) 91(6.25,-14.925) 92(6.75,-14.925) 93(7.25,-14.925) 94(7.75,-14.925) 95(8.25,-14.925) 96(8.75,-14.925) 97(9.25,-14.925) 98(9.75,-14.925) 99(10.25,-14.925) 100(10.75,-14.925) 101(11.25,-14.925) 102(11.75,-14.925) 103(12.25,-14.925) 104(12.75,-14.925) 157(12.75,14.925) 158(12.25,14.925) 159(11.75,14.925) 160(11.25,14.925) 161(10.75,14.925) 162(10.25,14.925) 163(9.75,14.925) 164(9.25,14.925) 165(8.75,14.925) 166(8.25,14.925) 167(7.75,14.925) 168(7.25,14.925) 169(6.75,14.925) 170(6.25,14.925) 171(5.75,14.925) 172(5.25,14.925) 173(4.75,14.925) 174(4.25,14.925) 175(3.75,14.925) 176(3.25,14.925) 177(2.75,14.925) 178(2.25,14.925) 179(1.75,14.925) 180(1.25,14.925) 181(0.75,14.925) 182(0.25,14.925) 183(-0.25,14.925) 184(-0.75,14.925) 185(-1.25,14.925) 186(-1.75,14.925) 187(-2.25,14.925) 188(-2.75,14.925) 189(-3.25,14.925) 190(-3.75,14.925) 191(-4.25,14.925) 192(-4.75,14.925) 193(-5.25,14.925) 194(-5.75,14.925) 195(-6.25,14.925) 196(-6.75,14.925) 197(-7.25,14.925) 198(-7.75,14.925) 199(-8.25,14.925) 200(-8.75,14.925) 201(-9.25,14.925) 202(-9.75,14.925) 203(-10.25,14.925) 204(-10.75,14.925) 205(-11.25,14.925) 206(-11.75,14.925) 207(-12.25,14.925) 208(-12.75,14.925)
  silkscreen extent -15.05,-13.55 13.55,13.57, body extent -14,-14 14,14, height 4
RN-5x603 [mil]
  rect 15.75x32 smd: 1(25.2,28) 2(50.39,28) 3(75.59,28) 6(25.2,-28) 7(50.39,-28) 8(75.59,-28)
  rect 19.68x32 smd: 4(104.72,28) 5(-3.94,-28) COM(-3.94,28) COM(104.72,-28)
  silkscreen extent -20,-59 118,59
"SCHURTER/SMD/2 PADS/0031.8221" [mm] "5x20 mm Fuse Holder, SMD"
  rect 7x7 smd: 1(-8.5,0) 2(8.5,0)
  silkscreen extent -12.5,-5.4 12.5,5.4
SM/C_0603 [mil]
  rect 32x38 smd: 1(0,0) 2(56,0)
  silkscreen extent -30,-33 86,32
SM/C_0805 [mil]
  rect 50x50 smd: 1(0,0) 2(84,0)
  silkscreen extent -38,-38 122,38
SM/C_POL_0805 [mil]
  rect 50x50 smd: 1(0,0) 2(84,0)
  silkscreen extent -38,-38 122,38
SM/CT_6032_12 [mil]
  rect 104x88 smd: 1(0,0) 2(196,0)
  silkscreen extent -80,-70 263,70
SM/L_0805 [mil]
  rect 40x48 smd: 1(0,0) 2(79,0)
  silkscreen extent -36,-40 114,40
SM/R_0603 [mil]
  rect 32x38 smd: 1(0,0) 2(56,0)
  silkscreen extent -30,-32 86,32
SOIC-8-Lead-Vishay-PFET [mm] "NFET"
  rect 5x5.07 smd: D(1.27,0)
  oval 1.9x0.6 smd: G(-2.575,-1.905) S(-2.575,1.905) S(-2.575,-0.635) S(-2.575,0.635)
  silkscreen extent -2.7,-2.5 1.22,2.88, body extent -2,-2.5 2,2.5, height 1.75
SOIC-8pin-micron-M25P40-Flash [mm] "SOIC, 8-Leads, M25P40 Flash"
  oval 2.45x0.65 smd: 1(-1.925,1.905) 2(-1.925,0.635) 3(-1.925,-0.635) 4(-1.925,-1.905) 5(1.925,-1.905) 6(1.925,-0.635) 7(1.925,0.635) 8(1.925,1.905)
  silkscreen extent -2.05,-2.5 1,2.9, body extent -2,-2.5 2,2.5, height 1.75
SOT23-93C46-EEPROM-Microchip [mm]
  rect 1.8x0.6 smd: 1(-1.2,0.95) 2(-1.2,0) 3(-1.2,-0.95) 4(1.2,-0.95) 5(1.2,0) 6(1.2,0.95)
  silkscreen extent -1.32,-1.55 0,1.92, body extent -0.87,-1.55 0.87,1.55, height 1.02
SOT23-BSS84-P-MOSFET [mm] "SOT23, 3-Leads, Body 3.0x2.6mm (max), Pitch 0.95mm, IPC Medium Density - SOT23-BSS84-P-MOSFET"
  rect 1.55x0.55 smd: 1(0.925,0) 2(-0.925,0.95) 3(-0.925,-0.95)
  silkscreen extent -1.05,-1.5 0.7,1.9, body extent -0.7,-1.5 0.7,1.5, height 1.1
SOT23-PGB1-ESD [mm]
  rect 1.02x1.27 smd: 1(-1.015,-2.29) 2(1.015,-2.29) 3(0,0)
SOT223-3Lead-STPackage-LinearTechLT1129-3.3 [mm] "LT1129-3.3"
  rect 2.4x1 smd: 1(-2.9,2.3) 2(-2.9,0) 3(-2.9,-2.3)
  rect 2.4x3.3 smd: 4(2.9,0)
  silkscreen extent -3.02,-3.35 1.3,3.47, body extent -1.85,-3.35 1.85,3.35, height 1.8
SW-10pos-SPST [mm] "CT21910MST-ND"
  oct 1.12x2.44 smd: 1(0,-4.305)
  rect 1.12x2.44 smd: 2(2.54,-4.305) 3(5.08,-4.305) 4(7.62,-4.305) 5(10.16,-4.305) 6(12.7,-4.305) 7(15.24,-4.305) 8(17.78,-4.305) 9(20.32,-4.305) 10(22.86,-4.305) 11(22.86,4.305) 12(20.32,4.305) 13(17.78,4.305) 14(15.24,4.305) 15(12.7,4.305) 16(10.16,4.305) 17(7.62,4.305) 18(5.08,4.305) 19(2.54,4.305) 20(0,4.305)
  silkscreen extent -2.25,-4.25 25.25,4.25
"T0-263 5Lead SMP - National Semi - LM2991S" [mm] "LM2991S"
  rect 2.8x1.1 smd: 1(-6.2,3.4) 2(-6.2,1.7) 3(-6.2,0) 4(-6.2,-1.7) 5(-6.2,-3.4)
  rect 7.5x8.33 smd: 6(4.318,0)
  silkscreen extent -6.32,-5.1 -0.7,5.1, body extent -3,-5.07 5.64,5.08, height 4.57
"T0-263- 5Lead - National Semi - LM2941" [mm] "LM2941 LDO Regulator"
  rect 2.8x1.1 smd: 1(-6.2,3.4) 2(-6.2,1.7) 3(-6.2,0) 4(-6.2,-1.7) 5(-6.2,-3.4)
  rect 7.9x7.2 smd: 6(3.65,0)
  silkscreen extent -6.32,-5.1 -0.7,5.1, body extent -3,-5.07 5.64,5.08, height 4.57
TSOT-23-5Lead-LTC3406A [mm] "TSOT-23-5Lead-LTC3406A"
  rect 1x0.55 smd: 1(-1.2,0.95) 2(-1.2,0) 3(-1.2,-0.95) 4(1.2,-0.95) 5(1.2,0.95)
  silkscreen extent -1.32,-1.5 0.3,1.9, body extent -0.87,-1.5 0.87,1.5, height 1.1
TSSOP-20PIN-74HC541 [mm] "BUFFER"
  oval 1.65x0.35 smd: 1(-2.875,2.925) 2(-2.875,2.275) 3(-2.875,1.625) 4(-2.875,0.975) 5(-2.875,0.325) 6(-2.875,-0.325) 7(-2.875,-0.975) 8(-2.875,-1.625) 9(-2.875,-2.275) 10(-2.875,-2.925) 11(2.875,-2.925) 12(2.875,-2.275) 13(2.875,-1.625) 14(2.875,-0.975) 15(2.875,-0.325) 16(2.875,0.325) 17(2.875,0.975) 18(2.875,1.625) 19(2.875,2.275) 20(2.875,2.925)
  silkscreen extent -3,-3.3 1.65,3.78, body extent -2.25,-3.3 2.25,3.3, height 1.2
USB-MINIB [mm] "SAMTEX-MUSB-05-X-B-SM-A-XX"
  rect 0x0 hole 1.5: 0(-2.2,-2.75) 0(2.2,-2.75)
  rect 0.5x2.5 smd: 1(-1.6,0) 2(-0.8,0) 3(0,0) 4(0.8,0) 5(1.6,0)
  rect 2x2.5 smd: 5(-4.45,0) 5(-4.4,-5.5) 5(4.44,-5.5) 5(4.45,0)
  silkscreen extent -2.4,-6.6 2.4,2.1
"XTAL 12MHz SMD" [mm] "FA-238V"
  rect 1.4x1.2 smd: 1(-1.2,-0.95) 2(1.2,-0.95) 3(1.2,0.95) 4(-1.2,0.95)

## Part data
C54 C55 C58 C59 C60 C61 C62 C63 C64 C65 C66 C69 C70 C71: "CAP"
D3 D7: library part "Schottky Diode"
DA1: library part LEDBARGRAPH
ESD1: library part PGB102ST23
F1: library part 2105, "FUSEHOLDER BLACK FOR SMD 5X20MM"
JC1 JC2 JO1 JO2 JO3 JO4 R1 R2 R3 R4 R5 R6 R7 R8 R9 R10 R11 R12 R13 R14 R15 R16 R17 R18 R19 R20 R21 R22 R23 R24 R25: "Resistor"
L3 L4 L5 L6 L7 L8 L9 L10 L11: library part 1660, "INDUCTOR SHIELD PWR 22UH 10145"
M1 M2 M3 M4 M5 M6 M7 M8 M9 M10 M11 M12 M13 M14 M15 M16 M17 M18 M19 M20 M21 M22: library part MountingHole
Q1 Q2: library part BSS84-MOSFET-P, "P-Channel MOSFET"
Q3: library part 2390, "mosfet,p ch,20v,10a,8soic; transistor polarity:p channel;"
RN1 RN2 RN3 RN4: "MNR15E0RPJ103"
S1: library part MOM-BUT
T1: library part DRQ127-100-XFORM-1:1
TVS1: library part 2519, "TVS 400W 12V BIDIRECT SMA"
U2: library part XC3S500E-PQ208
U4: library part 93CX6-EEPROM
U5: library part M25P40-Flash
U8 U9: library part LT1761-X
U10: library part "LM2941-LDO Regulator"
U11 U13: library part LT1370
U12: library part "LM2991-Negative LDO Regulator"
U14: library part "74HC541(Non-inverting buffer)"
USB1: "Mini USB"
VPWR1: library part 2Pin-PhoenixTerminalBlock
XCO1: library part XCO

## Via types
v1: diameter 40, hole 20, Top Layer to Bottom Layer, 117 vias
v2: diameter 25, hole 8, Top Layer to Bottom Layer, 67 vias

## Nets (pads, with @x,y where several pads share a name; then routed paths per layer and width w, separated by ;. In a path a pad name is that pad's centre, name@x,y a point inside that pad or via, vN(x,y) a via of type N, cw(c..) or ccw(c..) an arc to the next point about the centre after c; other vN are vias at no path point)
1.8V: C11.2 C12.2 C13.2 C23.2 U3.12 U3.37 U3.49 U3.64
1V2: C24.2 C25.2 C26.2 C27.2 C53.2 C55.1 U2.13 U2.67 U2.117 U2.170 U9.5 | length 719.9
  Top Layer w8: U2.170@6050.51,1158.5 6095.01,1203 v2(6104,1203) ; U2.117@6412.42,2003.41 6444,1971.82 v2(6444,1913) ; v2(6831,832) 6832.18,832 U2.13@6867.58,796.59 ; v2(7152,1622) 7154.5,1624.5 7184.65,1624.5 U2.67@7215.57,1655.42
  Top Layer w12: U9.5@3444.04,313.57 3604.39,313.57 C55.1@3621.8,296.17
  Bottom Layer w8: v2(6104,1203) 6141,1203 C27.2@6144,1200 ; C26.2@6444,1880 v2(6444,1913) ; C24.2@6800,864 6800,863 v2(6831,832) ; C25.2@7056,1660 7094,1622 v2(7152,1622)
2V5: C30.2 C31.2 C32.2 C33.2 C41.2 C42.2 C43.2 C44.2 C52.2 C54.1 R10.1 U2.7 U2.44 U2.66 U2.92 U2.111 U2.149 U2.166 U2.195 U8.5 | length 999.5
  Top Layer w8: U2.149@5967,1557.99 6003.98,1521 v2(6015,1521) ; U2.166@5994.83,1214.18 6033,1252.34 v2(6033,1273) ; U2.195@6398.5,810.51 6439.99,852 v2(6448,852) ; U2.111@6495.93,2086.92 6541.86,2041 v2(6551,2041) ; v2(6741,754) 6743.14,754 U2.7@6784.07,713.08 ; v2(6805,1954) 6818.18,1954 U2.92@6867.58,2003.41 ; v2(7187,1602) 7189.99,1602 U2.66@7229.49,1641.5 ; v2(7260,1266) 7261.18,1266 U2.44@7299.08,1228.1
  Top Layer w10: U8.5@3444.04,473.57 3614.2,473.57 C54.1@3616.8,476.17
  Bottom Layer w8: v2(6015,1521) 6016,1520 C31.2@6044,1520 ; v2(6033,1273) 6040,1280 C32.2@6064,1280 ; v2(6448,852) 6476,852 C33.2@6484,860 ; v2(6551,2041) 6552,2040 C30.2@6584,2040 ; C41.2@6720,784 6720,775 v2(6741,754) ; C44.2@6776,1960 6799,1960 v2(6805,1954) ; C43.2@7156,1580 7165,1580 v2(7187,1602) ; C42.2@7236,1300 7236,1290 v2(7260,1266)
3V3: C1_UDAS1.2 C1_UDAS2.2 C1_UDAS3.2 C1_UDAS4.2 C1_UDAS5.2 C1_UDAS6.2 C1_UDAS7.2 C1_UDAS8.2 C10.2 C14.2 C15.2 C16.2 C17.2 C18.2 C28.2 C34.2 C35.2 C36.2 C37.2 C38.2 C39.2 C40.2 C45.2 C46.2 C47.2 C48.2 C49.2 C50.2 C58.1 CON1.14 CON10.23 L1.1 L2.1 Q1.1 Q2.1 R4.1 R9.1 RN1.COM RN2.COM U1_UDAS1.23 U1_UDAS1.34 U1_UDAS2.23 U1_UDAS2.34 U1_UDAS3.23 U1_UDAS3.34 U1_UDAS4.23 U1_UDAS4.34 U1_UDAS5.23 U1_UDAS5.34 U1_UDAS6.23 U1_UDAS6.34 U1_UDAS7.23 U1_UDAS7.34 U1_UDAS8.23 U1_UDAS8.34 U2.21 U2.38 U2.46 U2.59 U2.73 U2.88 U2.114 U2.125 U2.143 U2.176 U2.191 U2.201 U3.20 U3.31 U3.42 U3.50 U3.56 U4.6 U5.3 U5.7 U5.8 U6.3 U14.20 XCO1.1 XCO1.4 | length 2208.5
  Top Layer w8: U2.143@6050.51,1641.5 6051.5,1641.5 v2(6095,1598) ; U2.176@6134.03,1074.98 6179.05,1120 v2(6182,1120) ; U2.125@6301.06,1892.05 6301.06,1891.94 v2(6361,1832) ; U2.191@6342.82,866.19 6381,904.37 v2(6381,907) ; U2.114@6454.18,2045.17 6454.18,2044.82 v2(6504,1995) ; U2.201@6482.01,727 6526.02,771 v2(6527,771) ; v2(6881,1909) 6919.73,1947.73 U2.88@6923.26,1947.73 ; v2(6938,949) 6938,948.89 U2.21@6978.94,907.95 ; v2(7026,1705) 7098.11,1705 U2.73@7132.05,1738.94 ; v2(7176,1184) 7176.15,1184 U2.38@7215.57,1144.58 ; v2(7285,1296) 7286.86,1296 U2.46@7326.92,1255.93 ; v2(7287,1505) 7287.86,1505 U2.59@7326.92,1544.07
  Top Layer w12: U6.3@3647.35,621.99 3721.52,696.17 C58.1@3776.8,696.17
  Bottom Layer w8: v2(6095,1598) 6097,1600 C47.2@6124,1600 ; v2(6182,1120) C48.2@6224,1120 ; v2(6361,1832) 6361,1803 C46.2@6364,1800 ; v2(6381,907) 6404,930 C49.2@6404,940 ; C45.2@6504,1960 v2(6504,1995) ; v2(6527,771) 6555,771 C50.2@6564,780 ; C39.2@6856,1880 6881,1905 v2(6881,1909) ; C34.2@6916,980 6916,971 v2(6938,949) ; C38.2@6996,1740 7026,1710 v2(7026,1705) ; C35.2@7136,1220 7140,1220 v2(7176,1184) ; C37.2@7256,1480 7262,1480 v2(7287,1505) ; C36.2@7276,1380 7276,1305 v2(7285,1296)
  Bottom Layer w10: U1_UDAS8.23@2839.08,2786.68 2896.76,2729 C1_UDAS8.2@2903,2729 ; U1_UDAS7.23@3848.08,2795.68 3905.76,2738 C1_UDAS7.2@3912,2738 ; U1_UDAS6.23@4827.08,2792.68 4884.76,2735 C1_UDAS6.2@4891,2735 ; U1_UDAS5.23@5858.08,2789.68 5915.76,2732 C1_UDAS5.2@5922,2732 ; U1_UDAS1.23@6862.08,2788.68 6919.76,2731 C1_UDAS1.2@6926,2731 ; U1_UDAS2.23@7862.08,2789.68 7919.76,2732 C1_UDAS2.2@7926,2732 ; U1_UDAS3.23@8852.08,2782.68 8909.76,2725 C1_UDAS3.2@8916,2725 ; U1_UDAS4.23@9823.08,2787.68 9880.76,2730 C1_UDAS4.2@9887,2730